# EAGLE board NU-Sockisop (EAGLE 5.11)
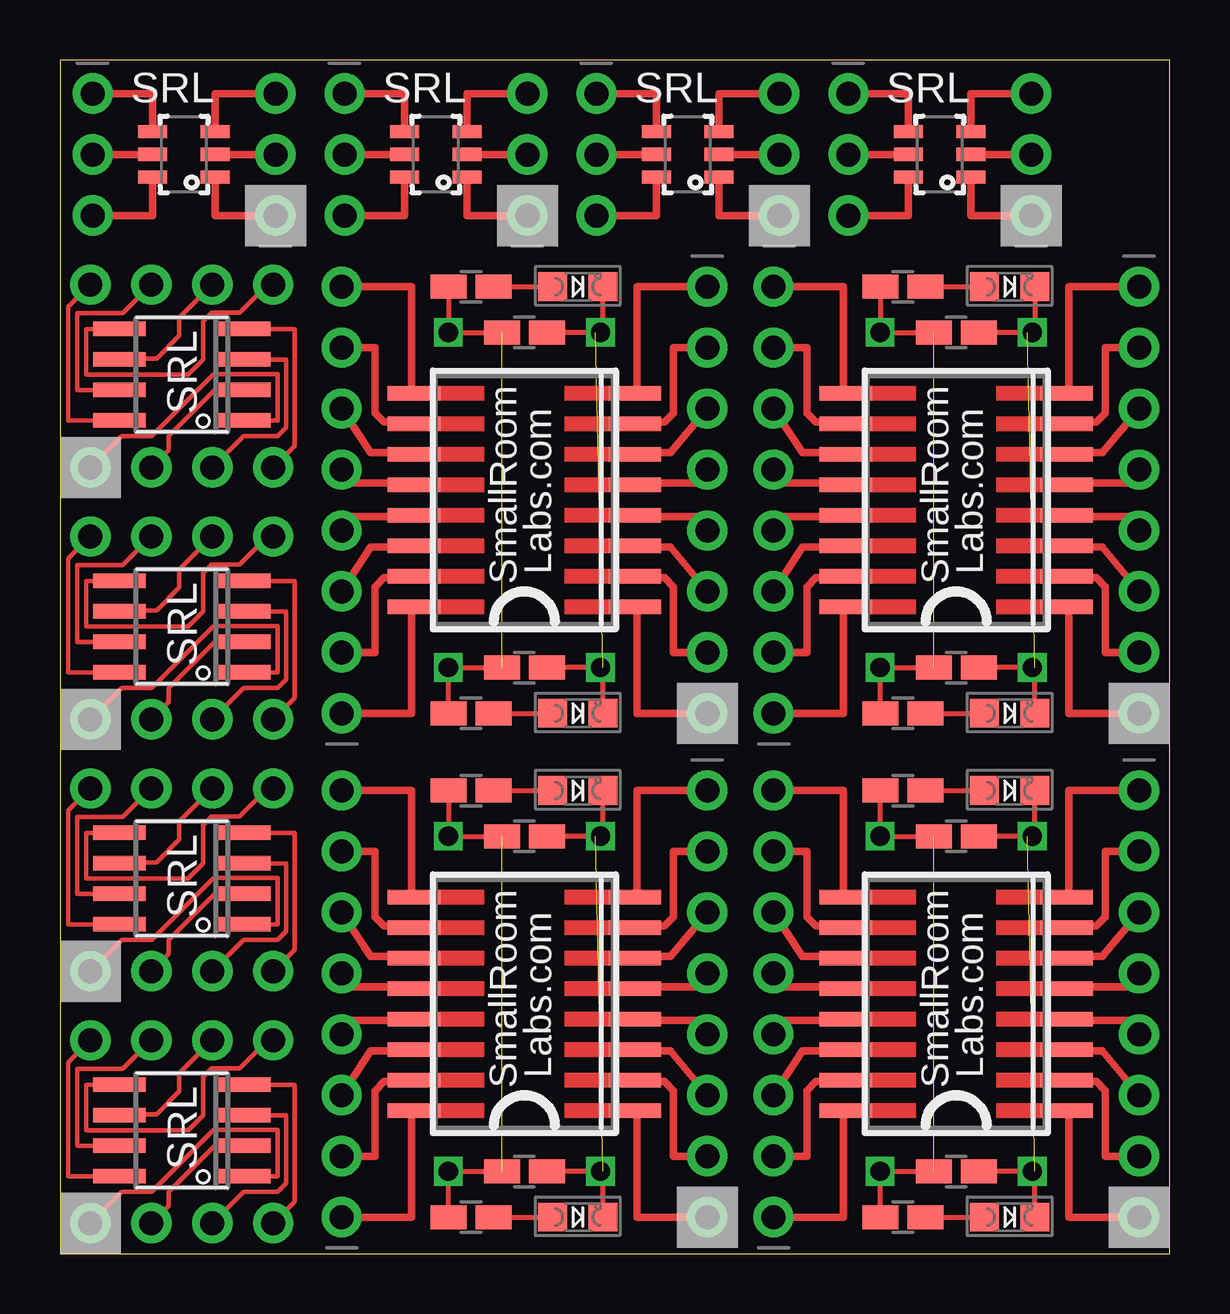
[diagram p0: board, top side]
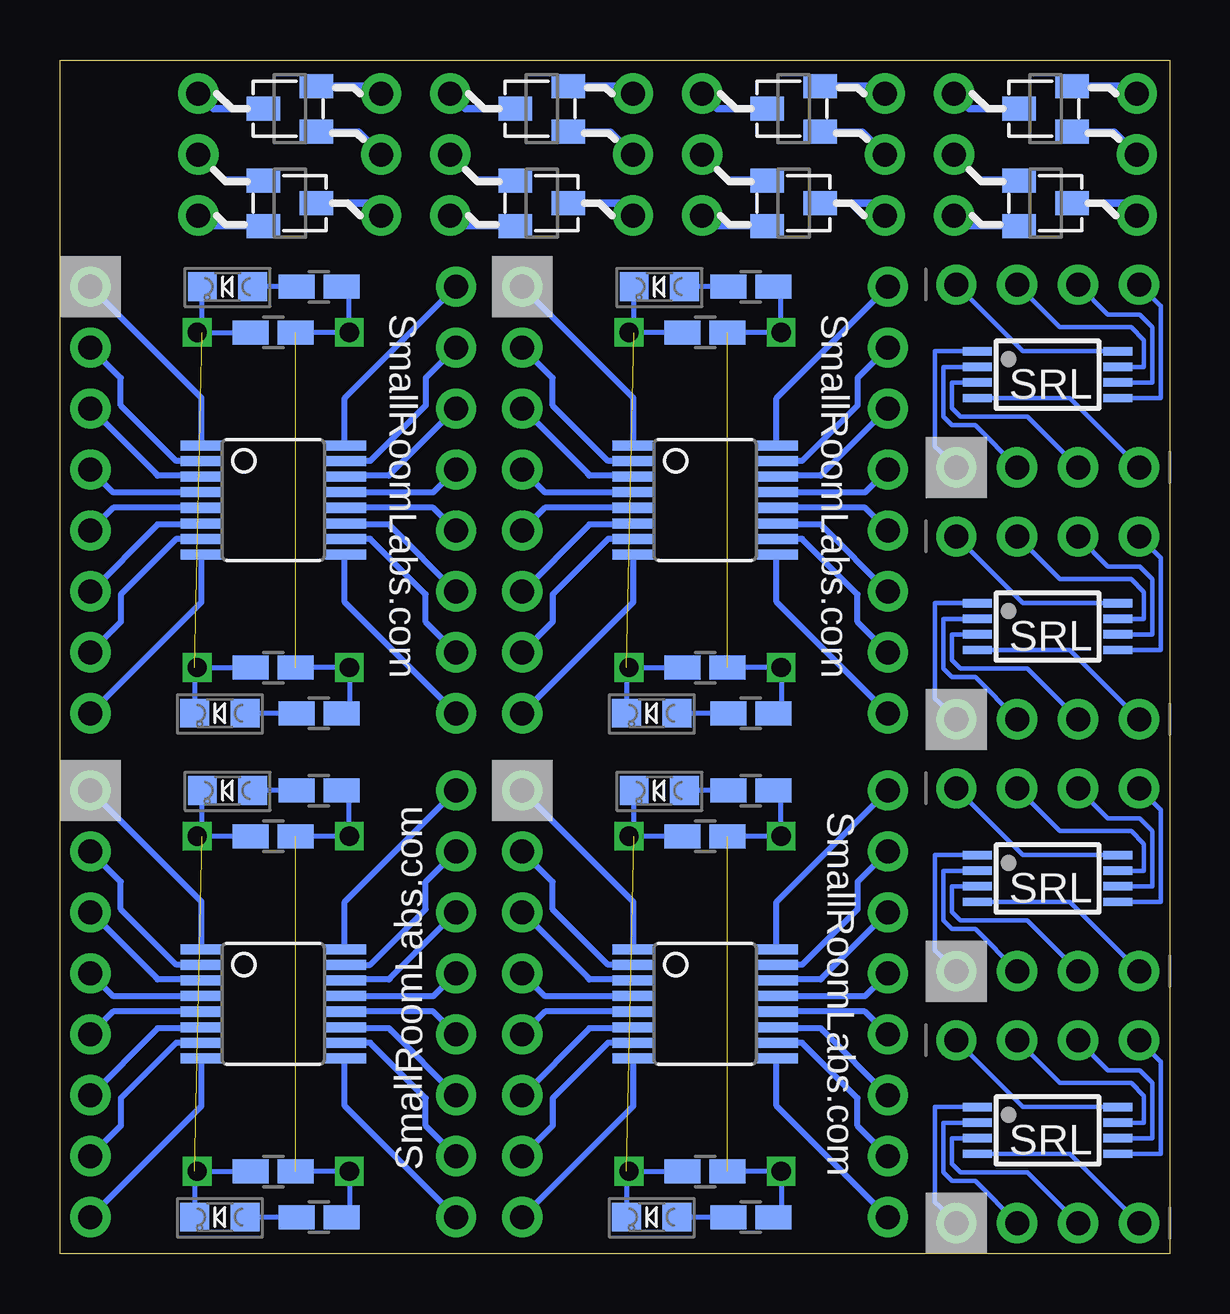
[diagram p1: board, bottom side, seen from below]

Size 46.25 x 49.75 mm. Coordinates in mm from the lower left corner, seen from the top.
Outline: 0,0 46.25,0 46.25,49.75 0,49.75 0,0
Copper layers (1*16): Top 0.035mm / dielectric 1.5mm / Bottom 0.035mm
Design rules "Fusion_eagle_rule_v1.1": minimum track width 6mil, minimum drill 12mil, track to track 6mil, track to pad 6mil, pad to pad 6mil, via to via 6mil, smd to smd 0mil, copper to edge 10mil, drill to drill 10mil, minimum pad ring 10mil, minimum via ring 6mil, stop-mask expansion 2mil, vias tented up to drill 100mil, thermal gap 10mil
Net classes: 0 default: width 0.178 mm, drill 0.305 mm, clearance 0.178 mm

## Footprints (pad centres in the part's own frame; a part is rotated, then mirrored left to right if it is on the bottom)
CHIPLED_0805 = smd 1.2 x 1.2: A 0,-1.05; C 0,1.05
SOT23-6 = smd 0.55 x 1.2: 1 0.32,-1.3; 2 1.27,-1.3; 3 2.22,-1.3; 4 2.22,1.3; 5 1.27,1.3; 6 0.32,1.3
SOT23 = smd 1 x 1.4: 1 -0.95,-1.1; 2 0.95,-1.1; 3 0,1.1
SOIC8 = smd 0.6 x 2.2: 1 -1.905,-2.6; 2 -0.635,-2.6; 3 0.635,-2.6; 4 1.905,-2.6; 5 1.905,2.6; 6 0.635,2.6; 7 -0.635,2.6; 8 -1.905,2.6
TSSOP8 = smd 1.2 x 0.35: 1 -2.925,0.975; 2 -2.925,0.325; 3 -2.925,-0.325; 4 -2.925,-0.975; 5 2.925,-0.975; 6 2.925,-0.325; 7 2.925,0.325; 8 2.925,0.975
SOIC16-DW = smd 0.6 x 2.2: 1 -4.445,-4.6; 2 -3.175,-4.6; 3 -1.905,-4.6; 4 -0.635,-4.6; 5 0.635,-4.6; 6 1.905,-4.6; 7 3.175,-4.6; 8 4.445,-4.6; 9 4.445,4.6; 10 3.175,4.6; 11 1.905,4.6; 12 0.635,4.6; 13 -0.635,4.6; 14 -1.905,4.6; 15 -3.175,4.6; 16 -4.445,4.6
TSSOP16L = smd 0.42 x 1.78: 1 -2.275,-2.97; 2 -1.625,-2.97; 3 -0.975,-2.97; 4 -0.325,-2.97; 5 0.325,-2.97; 6 0.975,-2.97; 7 1.625,-2.97; 8 2.275,-2.97; 9 2.275,2.97; 10 1.625,2.97; 11 0.975,2.97; 12 0.325,2.97; 13 -0.325,2.97; 14 -0.975,2.97; 15 -1.625,2.97; 16 -2.275,2.97
1X03_ROUND = drill 1 pad 1.676 round: 1 -2.54,0; 2 0,0; 3 2.54,0
1X04_ROUND = drill 1 pad 1.676 round: 1 -3.81,0; 2 -1.27,0; 3 1.27,0; 4 3.81,0
1X08_ROUND = drill 1 pad 1.676 round: 1 -8.89,0; 2 -6.35,0; 3 -3.81,0; 4 -1.27,0; 5 1.27,0; 6 3.81,0; 7 6.35,0; 8 8.89,0
R0805W = smd 1.5 x 1: 1 -0.94,0; 2 0.94,0

## Placement (x,y rotation side)
D1  LEDSMD0805  [CHIPLED_0805]  21.27,19.3 90 bottom
D2  LEDSMD0805  [CHIPLED_0805]  21.58,1.52 90 bottom
D3  LEDSMD0805  [CHIPLED_0805]  21.58,19.3 270 top
D4  LEDSMD0805  [CHIPLED_0805]  21.58,1.52 270 top
D5  LEDSMD0805  [CHIPLED_0805]  39.27,19.3 90 bottom
D6  LEDSMD0805  [CHIPLED_0805]  39.58,1.52 90 bottom
D7  LEDSMD0805  [CHIPLED_0805]  39.58,19.3 270 top
D8  LEDSMD0805  [CHIPLED_0805]  39.58,1.52 270 top
D9  LEDSMD0805  [CHIPLED_0805]  21.27,40.3 90 bottom
D10  LEDSMD0805  [CHIPLED_0805]  21.58,22.52 90 bottom
D11  LEDSMD0805  [CHIPLED_0805]  21.58,40.3 270 top
D12  LEDSMD0805  [CHIPLED_0805]  21.58,22.52 270 top
D13  LEDSMD0805  [CHIPLED_0805]  39.27,40.3 90 bottom
D14  LEDSMD0805  [CHIPLED_0805]  39.58,22.52 90 bottom
D15  LEDSMD0805  [CHIPLED_0805]  39.58,40.3 270 top
D16  LEDSMD0805  [CHIPLED_0805]  39.58,22.52 270 top
IC1  IC6SOT23  [SOT23-6]  5.17,44.54 90 top
IC2  IC3  [SOT23]  5.17,43.78 270 bottom
IC3  IC3  [SOT23]  5.17,47.72 90 bottom
IC4  IC6SOT23  [SOT23-6]  15.67,44.54 90 top
IC5  IC8SOIC  [SOIC8]  5.08,36.63 90 top
IC6  IC8TSSOP  [TSSOP8]  5.08,36.63 0 bottom
IC7  IC8SOIC  [SOIC8]  5.08,26.13 90 top
IC8  IC8TSSOP  [TSSOP8]  5.08,26.13 0 bottom
IC9  IC8SOIC  [SOIC8]  5.08,15.63 90 top
IC10  IC8TSSOP  [TSSOP8]  5.08,15.63 0 bottom
IC11  IC8SOIC  [SOIC8]  5.08,5.13 90 top
IC12  IC8TSSOP  [TSSOP8]  5.08,5.13 0 bottom
IC13  IC16SOIC  [SOIC16-DW]  19.36,10.41 90 top
IC14  IC16TSSOP  [TSSOP16L]  19.36,10.41 270 bottom
IC15  IC16SOIC  [SOIC16-DW]  37.36,10.41 90 top
IC16  IC16TSSOP  [TSSOP16L]  37.36,10.41 270 bottom
IC17  IC16SOIC  [SOIC16-DW]  19.36,31.41 90 top
IC18  IC16TSSOP  [TSSOP16L]  19.36,31.41 270 bottom
IC19  IC16SOIC  [SOIC16-DW]  37.36,31.41 90 top
IC20  IC16TSSOP  [TSSOP16L]  37.36,31.41 270 bottom
IC21  IC3  [SOT23]  15.67,43.78 270 bottom
IC22  IC3  [SOT23]  15.67,47.72 90 bottom
IC23  IC6SOT23  [SOT23-6]  26.17,44.54 90 top
IC24  IC3  [SOT23]  26.17,43.78 270 bottom
IC25  IC3  [SOT23]  26.17,47.72 90 bottom
IC26  IC6SOT23  [SOT23-6]  36.67,44.54 90 top
IC27  IC3  [SOT23]  36.67,43.78 270 bottom
IC28  IC3  [SOT23]  36.67,47.72 90 bottom
JP1  [1X03_ROUND]  8.98,45.81 90 top
JP2  [1X03_ROUND]  1.36,45.81 270 top
JP3  [1X03_ROUND]  19.48,45.81 90 top
JP4  [1X03_ROUND]  11.86,45.81 270 top
JP5  [1X04_ROUND]  5.08,40.39 0 bottom
JP6  [1X04_ROUND]  5.08,32.77 180 bottom
JP7  [1X04_ROUND]  5.08,29.89 0 bottom
JP8  [1X04_ROUND]  5.08,22.27 180 bottom
JP9  [1X04_ROUND]  5.08,19.39 0 bottom
JP10  [1X04_ROUND]  5.08,11.77 180 bottom
JP11  [1X04_ROUND]  5.08,8.89 0 bottom
JP12  [1X04_ROUND]  5.08,1.27 180 bottom
JP13  [1X08_ROUND]  26.98,10.41 270 top
JP14  [1X08_ROUND]  11.74,10.41 90 top
JP15  [1X08_ROUND]  44.98,10.41 270 top
JP16  [1X08_ROUND]  29.74,10.41 90 top
JP17  [1X08_ROUND]  26.98,31.41 270 top
JP18  [1X08_ROUND]  11.74,31.41 90 top
JP19  [1X08_ROUND]  44.98,31.41 270 top
JP20  [1X08_ROUND]  29.74,31.41 90 top
JP21  [1X03_ROUND]  29.98,45.81 90 top
JP22  [1X03_ROUND]  22.36,45.81 270 top
JP23  [1X03_ROUND]  40.48,45.81 90 top
JP24  [1X03_ROUND]  32.86,45.81 270 top
R1  [R0805W]  19.36,3.42 180 bottom
R2  [R0805W]  19.36,17.39 180 bottom
R3  [R0805W]  19.36,3.42 0 top
R4  [R0805W]  19.36,17.39 0 top
R5  [R0805W]  17.14,1.52 0 top
R6  [R0805W]  17.14,19.3 0 top
R7  [R0805W]  17.45,1.52 180 bottom
R8  [R0805W]  17.45,19.3 180 bottom
R9  [R0805W]  37.36,3.42 180 bottom
R10  [R0805W]  37.36,17.39 180 bottom
R11  [R0805W]  37.36,3.42 0 top
R12  [R0805W]  37.36,17.39 0 top
R13  [R0805W]  35.14,1.52 0 top
R14  [R0805W]  35.14,19.3 0 top
R15  [R0805W]  35.45,1.52 180 bottom
R16  [R0805W]  35.45,19.3 180 bottom
R17  [R0805W]  19.36,24.43 180 bottom
R18  [R0805W]  19.36,38.4 180 bottom
R19  [R0805W]  19.36,24.43 0 top
R20  [R0805W]  19.36,38.4 0 top
R21  [R0805W]  17.14,22.52 0 top
R22  [R0805W]  17.14,40.3 0 top
R23  [R0805W]  17.45,22.52 180 bottom
R24  [R0805W]  17.45,40.3 180 bottom
R25  [R0805W]  37.36,24.43 180 bottom
R26  [R0805W]  37.36,38.4 180 bottom
R27  [R0805W]  37.36,24.43 0 top
R28  [R0805W]  37.36,38.4 0 top
R29  [R0805W]  35.14,22.52 0 top
R30  [R0805W]  35.14,40.3 0 top
R31  [R0805W]  35.45,22.52 180 bottom
R32  [R0805W]  35.45,40.3 180 bottom

## Library data of the parts
D1-D16 IC1-IC28 = SmallRoomLabs
JP1-JP24 = microbuilder
R1-R32 = adafruit

## Nets
N$1: IC1.1 IC2.2 JP1.1
N$2: IC1.6 IC2.3 JP2.3
N$3: IC4.1 IC21.2 JP3.1
N$4: IC1.4 IC3.2 JP2.1
N$5: IC1.5 IC3.1 JP2.2
N$6: IC4.4 IC22.2 JP4.1
N$7: IC4.5 IC22.1 JP4.2
N$8: IC1.2 IC2.1 JP1.2
N$9: IC1.3 IC3.3 JP1.3
N$10: IC4.2 IC21.1 JP3.2
N$11: IC4.3 IC22.3 JP3.3
N$12: IC4.6 IC21.3 JP4.3
N$13: IC23.1 IC24.2 JP21.1
N$14: IC23.4 IC25.2 JP22.1
N$15: IC23.5 IC25.1 JP22.2
N$16: IC23.2 IC24.1 JP21.2
N$17: IC23.3 IC25.3 JP21.3
N$18: IC23.6 IC24.3 JP22.3
N$19: IC26.1 IC27.2 JP23.1
N$20: IC26.4 IC28.2 JP24.1
N$21: IC26.5 IC28.1 JP24.2
N$22: IC26.2 IC27.1 JP23.2
N$23: IC26.3 IC28.3 JP23.3
N$24: IC26.6 IC27.3 JP24.3
N$25: IC5.4 IC6.1 JP6.4
N$26: IC5.3 IC6.2 JP6.3
N$27: IC5.2 IC6.3 JP6.2
N$28: IC5.1 IC6.4 JP6.1
N$29: IC5.5 IC6.8 JP5.1
N$30: IC5.6 IC6.7 JP5.2
N$31: IC5.7 IC6.6 JP5.3
N$32: IC5.8 IC6.5 JP5.4
N$33: IC7.4 IC8.1 JP8.4
N$34: IC7.3 IC8.2 JP8.3
N$35: IC7.2 IC8.3 JP8.2
N$36: IC7.1 IC8.4 JP8.1
N$37: IC7.5 IC8.8 JP7.1
N$38: IC7.6 IC8.7 JP7.2
N$39: IC7.7 IC8.6 JP7.3
N$40: IC7.8 IC8.5 JP7.4
N$41: IC9.4 IC10.1 JP10.4
N$42: IC9.3 IC10.2 JP10.3
N$43: IC9.2 IC10.3 JP10.2
N$44: IC9.1 IC10.4 JP10.1
N$45: IC9.5 IC10.8 JP9.1
N$46: IC9.6 IC10.7 JP9.2
N$47: IC9.7 IC10.6 JP9.3
N$48: IC9.8 IC10.5 JP9.4
N$49: IC11.4 IC12.1 JP12.4
N$50: IC11.3 IC12.2 JP12.3
N$51: IC11.2 IC12.3 JP12.2
N$52: IC11.1 IC12.4 JP12.1
N$53: IC11.5 IC12.8 JP11.1
N$54: IC11.6 IC12.7 JP11.2
N$55: IC11.7 IC12.6 JP11.3
N$56: IC11.8 IC12.5 JP11.4
N$57: IC13.1 IC14.8 JP13.8
N$58: IC13.2 IC14.7 JP13.7
N$59: IC13.3 IC14.6 JP13.6
N$60: IC13.4 IC14.5 JP13.5
N$61: IC13.5 IC14.4 JP13.4
N$62: IC13.6 IC14.3 JP13.3
N$63: IC13.7 IC14.2 JP13.2
N$64: IC13.8 IC14.1 JP13.1
N$65: IC13.16 IC14.9 JP14.1
N$66: IC13.15 IC14.10 JP14.2
N$67: IC13.14 IC14.11 JP14.3
N$68: IC13.13 IC14.12 JP14.4
N$69: IC13.12 IC14.13 JP14.5
N$70: IC13.11 IC14.14 JP14.6
N$71: IC13.10 IC14.15 JP14.7
N$72: IC13.9 IC14.16 JP14.8
N$73: D1.A R8.2
N$74: D2.A R7.2
N$75: D3.A R6.2
N$76: D4.A R5.2
N$77: IC15.1 IC16.8 JP15.8
N$78: IC15.2 IC16.7 JP15.7
N$79: IC15.3 IC16.6 JP15.6
N$80: IC15.4 IC16.5 JP15.5
N$81: IC15.5 IC16.4 JP15.4
N$82: IC15.6 IC16.3 JP15.3
N$83: IC15.7 IC16.2 JP15.2
N$84: IC15.8 IC16.1 JP15.1
N$85: IC15.16 IC16.9 JP16.1
N$86: IC15.15 IC16.10 JP16.2
N$87: IC15.14 IC16.11 JP16.3
N$88: IC15.13 IC16.12 JP16.4
N$89: IC15.12 IC16.13 JP16.5
N$90: IC15.11 IC16.14 JP16.6
N$91: IC15.10 IC16.15 JP16.7
N$92: IC15.9 IC16.16 JP16.8
N$93: D5.A R16.2
N$94: D6.A R15.2
N$95: D7.A R14.2
N$96: D8.A R13.2
N$97: IC17.1 IC18.8 JP17.8
N$98: IC17.2 IC18.7 JP17.7
N$99: IC17.3 IC18.6 JP17.6
N$100: IC17.4 IC18.5 JP17.5
N$101: IC17.5 IC18.4 JP17.4
N$102: IC17.6 IC18.3 JP17.3
N$103: IC17.7 IC18.2 JP17.2
N$104: IC17.8 IC18.1 JP17.1
N$105: IC17.16 IC18.9 JP18.1
N$106: IC17.15 IC18.10 JP18.2
N$107: IC17.14 IC18.11 JP18.3
N$108: IC17.13 IC18.12 JP18.4
N$109: IC17.12 IC18.13 JP18.5
N$110: IC17.11 IC18.14 JP18.6
N$111: IC17.10 IC18.15 JP18.7
N$112: IC17.9 IC18.16 JP18.8
N$113: D9.A R24.2
N$114: D10.A R23.2
N$115: D11.A R22.2
N$116: D12.A R21.2
N$117: IC19.1 IC20.8 JP19.8
N$118: IC19.2 IC20.7 JP19.7
N$119: IC19.3 IC20.6 JP19.6
N$120: IC19.4 IC20.5 JP19.5
N$121: IC19.5 IC20.4 JP19.4
N$122: IC19.6 IC20.3 JP19.3
N$123: IC19.7 IC20.2 JP19.2
N$124: IC19.8 IC20.1 JP19.1
N$125: IC19.16 IC20.9 JP20.1
N$126: IC19.15 IC20.10 JP20.2
N$127: IC19.14 IC20.11 JP20.3
N$128: IC19.13 IC20.12 JP20.4
N$129: IC19.12 IC20.13 JP20.5
N$130: IC19.11 IC20.14 JP20.6
N$131: IC19.10 IC20.15 JP20.7
N$132: IC19.9 IC20.16 JP20.8
N$133: D13.A R32.2
N$134: D14.A R31.2
N$135: D15.A R30.2
N$136: D16.A R29.2
NEG1: D5.C D6.C D7.C D8.C R9.2 R10.2 R11.2 R12.2
NEG2: D9.C D10.C D11.C D12.C R17.2 R18.2 R19.2 R20.2
NEG3: D13.C D14.C D15.C D16.C R25.2 R26.2 R27.2 R28.2
NEG4: D1.C D2.C D3.C D4.C R1.2 R2.2 R3.2 R4.2
POS1: R9.1 R10.1 R11.1 R12.1 R13.1 R14.1 R15.1 R16.1
POS2: R17.1 R18.1 R19.1 R20.1 R21.1 R22.1 R23.1 R24.1
POS3: R25.1 R26.1 R27.1 R28.1 R29.1 R30.1 R31.1 R32.1
POS4: R1.1 R2.1 R3.1 R4.1 R5.1 R6.1 R7.1 R8.1

## Tracks (layer width: path | path; a pad name or v marks a point on that pad's centre or on a via)
N$1
  Top 0.305: JP1.1 6.47,43.27 6.46,43.45 6.46,44.84 IC1.1
  Bottom 0.305: JP1.1 8.55,42.84 6.29,42.84 IC2.2
N$2
  Top 0.305: IC1.6 3.88,44.84 3.88,43.45 3.87,43.27 3.72,43.27 JP2.3
  Bottom 0.305: JP2.3 1.87,43.78 4.05,43.78 IC2.3
N$3
  Top 0.305: JP3.1 16.97,43.27 16.96,43.45 16.96,44.84 IC4.1
  Bottom 0.305: JP3.1 19.05,42.84 16.79,42.84 IC21.2
N$4
  Top 0.305: JP2.1 3.87,48.35 3.88,48.17 3.88,46.77 IC1.4
  Bottom 0.305: JP2.1 1.67,48.66 4.05,48.66 IC3.2
N$5
  Top 0.305: JP2.2 3.85,45.81 IC1.5
  Bottom 0.305: JP2.2 2.3,46.75 4.05,46.75 IC3.1
N$6
  Top 0.305: JP4.1 14.37,48.35 14.38,48.17 14.38,46.77 IC4.4
  Bottom 0.305: JP4.1 12.16,48.66 14.55,48.66 IC22.2
N$7
  Top 0.305: JP4.2 14.35,45.81 IC4.5
  Bottom 0.305: JP4.2 12.8,46.75 14.55,46.75 IC22.1
N$8
  Top 0.305: JP1.2 6.49,45.81 IC1.2
  Bottom 0.305: JP1.2 7.91,44.74 6.29,44.74 IC2.1
N$9
  Top 0.305: JP1.3 6.47,48.35 6.46,48.17 6.46,46.77 IC1.3
  Bottom 0.305: JP1.3 8.35,47.72 6.29,47.72 IC3.3
N$10
  Top 0.305: JP3.2 16.99,45.81 IC4.2
  Bottom 0.305: JP3.2 18.41,44.74 16.79,44.74 IC21.1
N$11
  Top 0.305: JP3.3 16.97,48.35 16.96,48.17 16.96,46.77 IC4.3
  Bottom 0.305: JP3.3 18.84,47.72 16.79,47.72 IC22.3
N$12
  Top 0.305: IC4.6 14.38,44.84 14.38,43.45 14.37,43.27 14.22,43.27 JP4.3
  Bottom 0.305: JP4.3 12.37,43.78 14.55,43.78 IC21.3
N$13
  Top 0.305: JP21.1 27.47,43.27 27.46,43.45 27.46,44.84 IC23.1
  Bottom 0.305: JP21.1 29.55,42.84 27.29,42.84 IC24.2
N$14
  Top 0.305: JP22.1 24.87,48.35 24.88,48.17 24.88,46.77 IC23.4
  Bottom 0.305: JP22.1 22.66,48.66 25.05,48.66 IC25.2
N$15
  Top 0.305: JP22.2 24.85,45.81 IC23.5
  Bottom 0.305: JP22.2 23.3,46.75 25.05,46.75 IC25.1
N$16
  Top 0.305: JP21.2 27.49,45.81 IC23.2
  Bottom 0.305: JP21.2 28.91,44.74 27.29,44.74 IC24.1
N$17
  Top 0.305: JP21.3 27.47,48.35 27.46,48.17 27.46,46.77 IC23.3
  Bottom 0.305: JP21.3 29.34,47.72 27.29,47.72 IC25.3
N$18
  Top 0.305: IC23.6 24.88,44.84 24.88,43.45 24.87,43.27 24.72,43.27 JP22.3
  Bottom 0.305: JP22.3 22.87,43.78 25.05,43.78 IC24.3
N$19
  Top 0.305: JP23.1 37.97,43.27 37.97,43.45 37.97,44.84 IC26.1
  Bottom 0.305: JP23.1 40.05,42.84 37.79,42.84 IC27.2
N$20
  Top 0.305: JP24.1 35.37,48.35 35.38,48.17 35.38,46.77 IC26.4
  Bottom 0.305: JP24.1 33.16,48.66 35.55,48.66 IC28.2
N$21
  Top 0.305: JP24.2 35.35,45.81 IC26.5
  Bottom 0.305: JP24.2 33.8,46.75 35.55,46.75 IC28.1
N$22
  Top 0.305: JP23.2 37.99,45.81 IC26.2
  Bottom 0.305: JP23.2 39.41,44.74 37.79,44.74 IC27.1
N$23
  Top 0.305: JP23.3 37.97,48.35 37.97,48.17 37.97,46.77 IC26.3
  Bottom 0.305: JP23.3 39.84,47.72 37.79,47.72 IC28.3
N$24
  Top 0.305: IC26.6 35.38,44.84 35.38,43.45 35.37,43.27 35.22,43.27 JP24.3
  Bottom 0.305: JP24.3 33.37,43.78 35.55,43.78 IC27.3
N$25
  Top 0.178: IC5.4 9.78,38.54 9.78,33.66 JP6.4
  Bottom 0.178: IC6.1 9.78,37.61 9.78,33.63 9.58,33.46 JP6.4
N$26
  Top 0.178: IC5.3 9.42,37.27 9.42,34.43 9.07,34.08 7.66,34.08 JP6.3
  Bottom 0.178: IC6.2 9.42,36.96 9.42,34.88 9.07,34.52 8.1,34.52 JP6.3
N$27
  Top 0.178: IC5.2 6.45,36 4.53,34.08 4.53,33.49 JP6.2
  Bottom 0.178: IC6.3 9.06,36.31 9.07,36.3 9.07,35.23 8.71,34.88 5.92,34.88 JP6.2
N$28
  Top 0.178: IC5.1 9.07,34.73 9.07,36.66 6.4,36.66 3.82,34.08 2.58,34.08 JP6.1
  Bottom 0.178: IC6.4 4.16,35.66 JP6.1
N$29
  Top 0.178: IC5.5 1.09,38.54 1.09,36.63 5.33,36.63 5.97,37.27 5.97,38.87 6.33,39.22 7.49,39.22 8.66,40.39 JP5.1
  Bottom 0.178: IC6.8 6.11,37.61 JP5.1
N$30
  Top 0.178: IC5.6 2.5,37.3 4.02,37.3 4.98,38.26 4.98,39.02 JP5.2
  Bottom 0.178: IC6.7 1.07,36.96 1.07,38.08 1.6,38.61 4.57,38.61 JP5.2
N$31
  Top 0.178: IC5.7 2.4,36 1.9,36 0.72,35.99 0.72,39.2 1.3,39.2 2.62,39.2 JP5.3
  Bottom 0.178: IC6.6 0.89,36.31 0.89,36.3 0.71,36.3 0.71,38.61 1.25,39.15 2.56,39.15 JP5.3
N$32
  Top 0.178: JP5.4 0.34,39.46 0.34,34.73 IC5.8
  Bottom 0.178: IC6.5 0.36,35.66 0.36,39.5 0.38,39.5 JP5.4
N$33
  Top 0.178: IC7.4 9.78,28.04 9.78,23.16 JP8.4
  Bottom 0.178: IC8.1 9.78,27.11 9.78,23.13 9.58,22.96 JP8.4
N$34
  Top 0.178: IC7.3 9.42,26.77 9.42,23.93 9.07,23.58 7.66,23.58 JP8.3
  Bottom 0.178: IC8.2 9.42,26.46 9.42,24.38 9.07,24.02 8.1,24.02 JP8.3
N$35
  Top 0.178: IC7.2 6.45,25.5 4.53,23.58 4.53,22.99 JP8.2
  Bottom 0.178: IC8.3 9.06,25.81 9.07,25.8 9.07,24.73 8.71,24.38 5.92,24.38 JP8.2
N$36
  Top 0.178: IC7.1 9.07,24.23 9.07,26.16 6.4,26.16 3.82,23.58 2.58,23.58 JP8.1
  Bottom 0.178: IC8.4 4.16,25.16 JP8.1
N$37
  Top 0.178: IC7.5 1.09,28.04 1.09,26.13 5.33,26.13 5.97,26.77 5.97,28.37 6.33,28.72 7.49,28.72 8.66,29.89 JP7.1
  Bottom 0.178: IC8.8 6.11,27.11 JP7.1
N$38
  Top 0.178: IC7.6 2.5,26.8 4.02,26.8 4.98,27.76 4.98,28.52 JP7.2
  Bottom 0.178: IC8.7 1.07,26.46 1.07,27.58 1.6,28.11 4.57,28.11 JP7.2
N$39
  Top 0.178: IC7.7 2.4,25.5 1.9,25.5 0.72,25.49 0.72,28.7 1.3,28.7 2.62,28.7 JP7.3
  Bottom 0.178: IC8.6 0.89,25.81 0.89,25.8 0.71,25.8 0.71,28.11 1.25,28.64 2.56,28.64 JP7.3
N$40
  Top 0.178: JP7.4 0.34,28.96 0.34,24.23 IC7.8
  Bottom 0.178: IC8.5 0.36,25.16 0.36,29 0.38,29 JP7.4
N$41
  Top 0.178: IC9.4 9.78,17.54 9.78,12.66 JP10.4
  Bottom 0.178: IC10.1 9.78,16.61 9.78,12.63 9.58,12.46 JP10.4
N$42
  Top 0.178: IC9.3 9.42,16.27 9.42,13.43 9.07,13.08 7.66,13.08 JP10.3
  Bottom 0.178: IC10.2 9.42,15.96 9.42,13.88 9.07,13.52 8.1,13.52 JP10.3
N$43
  Top 0.178: IC9.2 6.45,15 4.53,13.08 4.53,12.49 JP10.2
  Bottom 0.178: IC10.3 9.06,15.31 9.07,15.3 9.07,14.23 8.71,13.88 5.92,13.88 JP10.2
N$44
  Top 0.178: IC9.1 9.07,13.73 9.07,15.66 6.4,15.66 3.82,13.08 2.58,13.08 JP10.1
  Bottom 0.178: IC10.4 4.16,14.66 JP10.1
N$45
  Top 0.178: IC9.5 1.09,17.54 1.09,15.63 5.33,15.63 5.97,16.27 5.97,17.87 6.33,18.22 7.49,18.22 8.66,19.39 JP9.1
  Bottom 0.178: IC10.8 6.11,16.61 JP9.1
N$46
  Top 0.178: IC9.6 2.5,16.3 4.02,16.3 4.98,17.26 4.98,18.02 JP9.2
  Bottom 0.178: IC10.7 1.07,15.96 1.07,17.08 1.6,17.61 4.57,17.61 JP9.2
N$47
  Top 0.178: IC9.7 2.4,15 1.9,15 0.72,14.99 0.72,18.2 1.3,18.2 2.62,18.2 JP9.3
  Bottom 0.178: IC10.6 0.89,15.31 0.89,15.3 0.71,15.3 0.71,17.61 1.25,18.14 2.56,18.14 JP9.3
N$48
  Top 0.178: JP9.4 0.34,18.46 0.34,13.73 IC9.8
  Bottom 0.178: IC10.5 0.36,14.66 0.36,18.5 0.38,18.5 JP9.4
N$49
  Top 0.178: IC11.4 9.78,7.04 9.78,2.16 JP12.4
  Bottom 0.178: IC12.1 9.78,6.11 9.78,2.13 9.58,1.96 JP12.4
N$50
  Top 0.178: IC11.3 9.42,5.77 9.42,2.93 9.07,2.58 7.66,2.58 JP12.3
  Bottom 0.178: IC12.2 9.42,5.46 9.42,3.38 9.07,3.02 8.1,3.02 JP12.3
N$51
  Top 0.178: IC11.2 6.45,4.5 4.53,2.58 4.53,1.99 JP12.2
  Bottom 0.178: IC12.3 9.06,4.81 9.07,4.8 9.07,3.73 8.71,3.38 5.92,3.38 JP12.2
N$52
  Top 0.178: IC11.1 9.07,3.23 9.07,5.16 6.4,5.16 3.82,2.58 2.58,2.58 JP12.1
  Bottom 0.178: IC12.4 4.16,4.16 JP12.1
N$53
  Top 0.178: IC11.5 1.09,7.04 1.09,5.13 5.33,5.13 5.97,5.77 5.97,7.37 6.33,7.72 7.49,7.72 8.66,8.89 JP11.1
  Bottom 0.178: IC12.8 6.11,6.11 JP11.1
N$54
  Top 0.178: IC11.6 2.5,5.8 4.02,5.8 4.98,6.76 4.98,7.52 JP11.2
  Bottom 0.178: IC12.7 1.07,5.46 1.07,6.58 1.6,7.11 4.57,7.11 JP11.2
N$55
  Top 0.178: IC11.7 2.4,4.5 1.9,4.5 0.72,4.49 0.72,7.7 1.3,7.7 2.62,7.7 JP11.3
  Bottom 0.178: IC12.6 0.89,4.81 0.89,4.8 0.71,4.8 0.71,7.11 1.25,7.64 2.56,7.64 JP11.3
N$56
  Top 0.178: JP11.4 0.34,7.96 0.34,3.23 IC11.8
  Bottom 0.178: IC12.5 0.36,4.16 0.36,8 0.38,8 JP11.4
N$57
  Top 0.305: JP13.8 24.06,1.52 24.06,5.96 IC13.1
  Bottom 0.254: JP13.8 22.34,6.16 22.34,8.12 IC14.8
N$58
  Top 0.305: JP13.7 25.58,4.06 25.58,6.79 25.2,7.17 24.44,7.17 24.06,7.24 IC13.2
  Bottom 0.254: JP13.7 25.71,5.33 25.71,6.47 23.4,8.78 IC14.7
N$59
  Top 0.305: JP13.6 25.46,8.44 24.44,8.44 24.06,8.51 IC13.3
  Bottom 0.254: IC14.6 22.37,9.39 24.19,9.39 24.26,9.29 26.95,6.6 JP13.6
N$60
  Top 0.305: JP13.5 26.73,9.71 24.44,9.71 24.06,9.78 IC13.4
  Bottom 0.254: JP13.5 26.03,10.09 22.34,10.09 IC14.5
N$61
  Top 0.305: JP13.4 26.73,11.11 24.44,11.11 24.06,11.04 IC13.5
  Bottom 0.254: JP13.4 26.03,10.73 22.34,10.73 IC14.4
N$62
  Top 0.305: JP13.3 25.46,12.38 24.12,12.38 24.06,12.31 IC13.6
  Bottom 0.254: IC14.3 22.37,11.43 24.19,11.43 24.26,11.53 26.95,14.22 JP13.3
N$63
  Top 0.305: JP13.2 25.58,16.76 25.58,14.03 25.2,13.65 24.44,13.65 24.06,13.59 IC13.7
  Bottom 0.254: JP13.2 25.71,15.49 25.71,14.35 23.4,12.04 IC14.2
N$64
  Top 0.305: JP13.1 24.06,19.3 24.06,14.86 IC13.8
  Bottom 0.254: JP13.1 22.34,14.66 22.34,12.7 IC14.1
N$65
  Top 0.305: JP14.1 14.66,1.52 14.66,5.96 IC13.16
  Bottom 0.254: JP14.1 16.38,6.16 16.38,8.12 IC14.9
N$66
  Top 0.305: JP14.2 13.14,4.06 13.14,6.79 13.52,7.17 14.28,7.17 14.66,7.24 IC13.15
  Bottom 0.254: JP14.2 13.01,5.33 13.01,6.47 15.32,8.78 IC14.10
N$67
  Top 0.305: JP14.3 12.95,8.44 14.28,8.44 14.66,8.51 IC13.14
  Bottom 0.254: IC14.11 16.35,9.39 14.53,9.39 14.46,9.29 11.77,6.6 JP14.3
N$68
  Top 0.305: JP14.4 11.99,9.71 14.28,9.71 14.66,9.78 IC13.13
  Bottom 0.254: JP14.4 12.69,10.09 16.38,10.09 IC14.12
N$69
  Top 0.305: JP14.5 11.99,11.11 14.28,11.11 14.66,11.04 IC13.12
  Bottom 0.254: JP14.5 12.69,10.73 16.38,10.73 IC14.13
N$70
  Top 0.305: JP14.6 12.95,12.38 14.28,12.38 14.66,12.31 IC13.11
  Bottom 0.254: IC14.14 16.35,11.43 14.53,11.43 14.46,11.53 11.77,14.22 JP14.6
N$71
  Top 0.305: JP14.7 13.14,16.76 13.14,14.03 13.52,13.65 14.28,13.65 14.66,13.59 IC13.10
  Bottom 0.254: JP14.7 13.01,15.49 13.01,14.35 15.32,12.04 IC14.15
N$72
  Top 0.305: JP14.8 14.66,19.3 14.66,14.86 IC13.9
  Bottom 0.254: JP14.8 16.38,14.66 16.38,12.7 IC14.16
N$73
  Bottom 0.203: R8.2 D1.A
N$74
  Bottom 0.203: R7.2 D2.A
N$75
  Top 0.203: R6.2 D3.A
N$76
  Top 0.203: R5.2 D4.A
N$77
  Top 0.305: JP15.8 42.06,1.52 42.06,5.96 IC15.1
  Bottom 0.254: JP15.8 40.34,6.16 40.34,8.12 IC16.8
N$78
  Top 0.305: JP15.7 43.58,4.06 43.58,6.79 43.2,7.17 42.44,7.17 42.06,7.24 IC15.2
  Bottom 0.254: JP15.7 43.71,5.33 43.71,6.47 41.4,8.78 IC16.7
N$79
  Top 0.305: JP15.6 43.46,8.44 42.44,8.44 42.06,8.51 IC15.3
  Bottom 0.254: IC16.6 40.37,9.39 42.19,9.39 42.26,9.29 44.95,6.6 JP15.6
N$80
  Top 0.305: JP15.5 44.73,9.71 42.44,9.71 42.06,9.78 IC15.4
  Bottom 0.254: JP15.5 44.03,10.09 40.34,10.09 IC16.5
N$81
  Top 0.305: JP15.4 44.73,11.11 42.44,11.11 42.06,11.04 IC15.5
  Bottom 0.254: JP15.4 44.03,10.73 40.34,10.73 IC16.4
N$82
  Top 0.305: JP15.3 43.46,12.38 42.12,12.38 42.06,12.31 IC15.6
  Bottom 0.254: IC16.3 40.37,11.43 42.19,11.43 42.26,11.53 44.95,14.22 JP15.3
N$83
  Top 0.305: JP15.2 43.58,16.76 43.58,14.03 43.2,13.65 42.44,13.65 42.06,13.59 IC15.7
  Bottom 0.254: JP15.2 43.71,15.49 43.71,14.35 41.4,12.04 IC16.2
N$84
  Top 0.305: JP15.1 42.06,19.3 42.06,14.86 IC15.8
  Bottom 0.254: JP15.1 40.34,14.66 40.34,12.7 IC16.1
N$85
  Top 0.305: JP16.1 32.66,1.52 32.66,5.96 IC15.16
  Bottom 0.254: JP16.1 34.38,6.16 34.38,8.12 IC16.9
N$86
  Top 0.305: JP16.2 31.14,4.06 31.14,6.79 31.52,7.17 32.28,7.17 32.66,7.24 IC15.15
  Bottom 0.254: JP16.2 31.01,5.33 31.01,6.47 33.32,8.78 IC16.10
N$87
  Top 0.305: JP16.3 30.95,8.44 32.28,8.44 32.66,8.51 IC15.14
  Bottom 0.254: IC16.11 34.35,9.39 32.53,9.39 32.46,9.29 29.77,6.6 JP16.3
N$88
  Top 0.305: JP16.4 29.99,9.71 32.28,9.71 32.66,9.78 IC15.13
  Bottom 0.254: JP16.4 30.69,10.09 34.38,10.09 IC16.12
N$89
  Top 0.305: JP16.5 29.99,11.11 32.28,11.11 32.66,11.04 IC15.12
  Bottom 0.254: JP16.5 30.69,10.73 34.38,10.73 IC16.13
N$90
  Top 0.305: JP16.6 30.95,12.38 32.28,12.38 32.66,12.31 IC15.11
  Bottom 0.254: IC16.14 34.35,11.43 32.53,11.43 32.46,11.53 29.77,14.22 JP16.6
N$91
  Top 0.305: JP16.7 31.14,16.76 31.14,14.03 31.52,13.65 32.28,13.65 32.66,13.59 IC15.10
  Bottom 0.254: JP16.7 31.01,15.49 31.01,14.35 33.32,12.04 IC16.15
N$92
  Top 0.305: JP16.8 32.66,19.3 32.66,14.86 IC15.9
  Bottom 0.254: JP16.8 34.38,14.66 34.38,12.7 IC16.16
N$93
  Bottom 0.203: R16.2 D5.A
N$94
  Bottom 0.203: R15.2 D6.A
N$95
  Top 0.203: R14.2 D7.A
N$96
  Top 0.203: R13.2 D8.A
N$97
  Top 0.305: JP17.8 24.06,22.52 24.06,26.96 IC17.1
  Bottom 0.254: JP17.8 22.34,27.16 22.34,29.12 IC18.8
N$98
  Top 0.305: JP17.7 25.58,25.06 25.58,27.79 25.2,28.17 24.44,28.17 24.06,28.23 IC17.2
  Bottom 0.254: JP17.7 25.71,26.33 25.71,27.47 23.4,29.78 IC18.7
N$99
  Top 0.305: JP17.6 25.46,29.44 24.44,29.44 24.06,29.5 IC17.3
  Bottom 0.254: IC18.6 22.37,30.39 24.19,30.39 24.26,30.29 26.95,27.6 JP17.6
N$100
  Top 0.305: JP17.5 26.73,30.71 24.44,30.71 24.06,30.77 IC17.4
  Bottom 0.254: JP17.5 26.03,31.09 22.34,31.09 IC18.5
N$101
  Top 0.305: JP17.4 26.73,32.11 24.44,32.11 24.06,32.05 IC17.5
  Bottom 0.254: JP17.4 26.03,31.73 22.34,31.73 IC18.4
N$102
  Top 0.305: JP17.3 25.46,33.38 24.12,33.38 24.06,33.31 IC17.6
  Bottom 0.254: IC18.3 22.37,32.43 24.19,32.43 24.26,32.53 26.95,35.22 JP17.3
N$103
  Top 0.305: JP17.2 25.58,37.76 25.58,35.03 25.2,34.65 24.44,34.65 24.06,34.59 IC17.7
  Bottom 0.254: JP17.2 25.71,36.49 25.71,35.35 23.4,33.04 IC18.2
N$104
  Top 0.305: JP17.1 24.06,40.3 24.06,35.85 IC17.8
  Bottom 0.254: JP17.1 22.34,35.66 22.34,33.7 IC18.1
N$105
  Top 0.305: JP18.1 14.66,22.52 14.66,26.96 IC17.16
  Bottom 0.254: JP18.1 16.38,27.16 16.38,29.12 IC18.9
N$106
  Top 0.305: JP18.2 13.14,25.06 13.14,27.79 13.52,28.17 14.28,28.17 14.66,28.23 IC17.15
  Bottom 0.254: JP18.2 13.01,26.33 13.01,27.47 15.32,29.78 IC18.10
N$107
  Top 0.305: JP18.3 12.95,29.44 14.28,29.44 14.66,29.5 IC17.14
  Bottom 0.254: IC18.11 16.35,30.39 14.53,30.39 14.46,30.29 11.77,27.6 JP18.3
N$108
  Top 0.305: JP18.4 11.99,30.71 14.28,30.71 14.66,30.77 IC17.13
  Bottom 0.254: JP18.4 12.69,31.09 16.38,31.09 IC18.12
N$109
  Top 0.305: JP18.5 11.99,32.11 14.28,32.11 14.66,32.05 IC17.12
  Bottom 0.254: JP18.5 12.69,31.73 16.38,31.73 IC18.13
N$110
  Top 0.305: JP18.6 12.95,33.38 14.28,33.38 14.66,33.31 IC17.11
  Bottom 0.254: IC18.14 16.35,32.43 14.53,32.43 14.46,32.53 11.77,35.22 JP18.6
N$111
  Top 0.305: JP18.7 13.14,37.76 13.14,35.03 13.52,34.65 14.28,34.65 14.66,34.59 IC17.10
  Bottom 0.254: JP18.7 13.01,36.49 13.01,35.35 15.32,33.04 IC18.15
N$112
  Top 0.305: JP18.8 14.66,40.3 14.66,35.85 IC17.9
  Bottom 0.254: JP18.8 16.38,35.66 16.38,33.7 IC18.16
N$113
  Bottom 0.203: R24.2 D9.A
N$114
  Bottom 0.203: R23.2 D10.A
N$115
  Top 0.203: R22.2 D11.A
N$116
  Top 0.203: R21.2 D12.A
N$117
  Top 0.305: JP19.8 42.06,22.52 42.06,26.96 IC19.1
  Bottom 0.254: JP19.8 40.34,27.16 40.34,29.12 IC20.8
N$118
  Top 0.305: JP19.7 43.58,25.06 43.58,27.79 43.2,28.17 42.44,28.17 42.06,28.23 IC19.2
  Bottom 0.254: JP19.7 43.71,26.33 43.71,27.47 41.4,29.78 IC20.7
N$119
  Top 0.305: JP19.6 43.46,29.44 42.44,29.44 42.06,29.5 IC19.3
  Bottom 0.254: IC20.6 40.37,30.39 42.19,30.39 42.26,30.29 44.95,27.6 JP19.6
N$120
  Top 0.305: JP19.5 44.73,30.71 42.44,30.71 42.06,30.77 IC19.4
  Bottom 0.254: JP19.5 44.03,31.09 40.34,31.09 IC20.5
N$121
  Top 0.305: JP19.4 44.73,32.11 42.44,32.11 42.06,32.05 IC19.5
  Bottom 0.254: JP19.4 44.03,31.73 40.34,31.73 IC20.4
N$122
  Top 0.305: JP19.3 43.46,33.38 42.12,33.38 42.06,33.31 IC19.6
  Bottom 0.254: IC20.3 40.37,32.43 42.19,32.43 42.26,32.53 44.95,35.22 JP19.3
N$123
  Top 0.305: JP19.2 43.58,37.76 43.58,35.03 43.2,34.65 42.44,34.65 42.06,34.59 IC19.7
  Bottom 0.254: JP19.2 43.71,36.49 43.71,35.35 41.4,33.04 IC20.2
N$124
  Top 0.305: JP19.1 42.06,40.3 42.06,35.85 IC19.8
  Bottom 0.254: JP19.1 40.34,35.66 40.34,33.7 IC20.1
N$125
  Top 0.305: JP20.1 32.66,22.52 32.66,26.96 IC19.16
  Bottom 0.254: JP20.1 34.38,27.16 34.38,29.12 IC20.9
N$126
  Top 0.305: JP20.2 31.14,25.06 31.14,27.79 31.52,28.17 32.28,28.17 32.66,28.23 IC19.15
  Bottom 0.254: JP20.2 31.01,26.33 31.01,27.47 33.32,29.78 IC20.10
N$127
  Top 0.305: JP20.3 30.95,29.44 32.28,29.44 32.66,29.5 IC19.14
  Bottom 0.254: IC20.11 34.35,30.39 32.53,30.39 32.46,30.29 29.77,27.6 JP20.3
N$128
  Top 0.305: JP20.4 29.99,30.71 32.28,30.71 32.66,30.77 IC19.13
  Bottom 0.254: JP20.4 30.69,31.09 34.38,31.09 IC20.12
N$129
  Top 0.305: JP20.5 29.99,32.11 32.28,32.11 32.66,32.05 IC19.12
  Bottom 0.254: JP20.5 30.69,31.73 34.38,31.73 IC20.13
N$130
  Top 0.305: JP20.6 30.95,33.38 32.28,33.38 32.66,33.31 IC19.11
  Bottom 0.254: IC20.14 34.35,32.43 32.53,32.43 32.46,32.53 29.77,35.22 JP20.6
N$131
  Top 0.305: JP20.7 31.14,37.76 31.14,35.03 31.52,34.65 32.28,34.65 32.66,34.59 IC19.10
  Bottom 0.254: JP20.7 31.01,36.49 31.01,35.35 33.32,33.04 IC20.15
N$132
  Top 0.305: JP20.8 32.66,40.3 32.66,35.85 IC19.9
  Bottom 0.254: JP20.8 34.38,35.66 34.38,33.7 IC20.16
N$133
  Bottom 0.203: R32.2 D13.A
N$134
  Bottom 0.203: R31.2 D14.A
N$135
  Top 0.203: R30.2 D15.A
N$136
  Top 0.203: R29.2 D16.A
NEG1  (via drill 0.8)  (1 unrouted)
  Top 0.203: R9.2 v40.53,3.42 40.63,3.42 D8.C | R10.2 v40.53,17.39 40.63,17.39 D7.C
  Bottom 0.203: R9.2 v40.53,3.42 40.63,3.42 D8.C | D5.C 40.31,17.39 v40.53,17.39 R10.2
NEG2  (via drill 0.8)  (1 unrouted)
  Top 0.203: R17.2 v22.54,24.43 22.63,24.43 D12.C | R18.2 v22.54,38.4 22.63,38.4 D11.C
  Bottom 0.203: R17.2 v22.54,24.43 22.63,24.43 D12.C | D9.C 22.32,38.4 v22.54,38.4 R18.2
NEG3  (via drill 0.8)  (1 unrouted)
  Top 0.203: R25.2 v40.53,24.43 40.63,24.43 D16.C | R26.2 v40.53,38.4 40.63,38.4 D15.C
  Bottom 0.203: R25.2 v40.53,24.43 40.63,24.43 D16.C | D13.C 40.31,38.4 v40.53,38.4 R26.2
NEG4  (via drill 0.8)  (1 unrouted)
  Top 0.203: R1.2 v22.54,3.42 22.63,3.42 D4.C | R2.2 v22.54,17.39 22.63,17.39 D3.C
  Bottom 0.203: R1.2 v22.54,3.42 22.63,3.42 D4.C | D1.C 22.32,17.39 v22.54,17.39 R2.2
POS1  (via drill 0.8)  (1 unrouted)
  Top 0.203: v34.19,17.39 R10.1 | R9.1 v34.19,3.42 v34.2,3.42 R13.1 R15.1 | v34.19,17.39 34.52,17.39 | R14.1 v34.2,17.39 v34.19,17.39
  Bottom 0.203: R9.1 v34.19,3.42 34.19,1.52 R15.1 | R16.1 R14.1 v34.2,17.39 v34.19,17.39 R10.1
POS2  (via drill 0.8)  (1 unrouted)
  Top 0.203: v16.18,38.4 R18.1 | R17.1 v16.18,24.43 16.2,24.43 R21.1 R23.1 | v16.18,38.4 16.52,38.4 | R22.1 16.2,38.4 v16.18,38.4
  Bottom 0.203: R17.1 v16.18,24.43 16.18,22.52 R23.1 | R24.1 R22.1 16.2,38.4 v16.18,38.4 R18.1
POS3  (via drill 0.8)  (1 unrouted)
  Top 0.203: v34.19,38.4 R26.1 | R25.1 v34.19,24.43 v34.2,24.43 R29.1 R31.1 | v34.19,38.4 34.52,38.4 | R30.1 v34.2,38.4 v34.19,38.4
  Bottom 0.203: R25.1 v34.19,24.43 34.19,22.52 R31.1 | R32.1 R30.1 v34.2,38.4 v34.19,38.4 R26.1
POS4  (via drill 0.8)  (1 unrouted)
  Top 0.203: v16.18,17.39 R2.1 | R1.1 v16.18,3.42 16.2,3.42 R5.1 R7.1 | v16.18,17.39 16.52,17.39 | R6.1 16.2,17.39 v16.18,17.39
  Bottom 0.203: R1.1 v16.18,3.42 16.18,1.52 R7.1 | R8.1 R6.1 16.2,17.39 v16.18,17.39 R2.1
(copper drawn outside any net)
  shapes: Top area x68

## Text on the board
tPlace: SRL | SRL | SRL | SRL | SRL | SRL | SmallRoom | Labs.com | SmallRoom | Labs.com | SRL | SRL | SmallRoom | Labs.com | SmallRoom | Labs.com
bPlace: SmallRoomLabs.com | SmallRoomLabs.com | SRL | SRL | SmallRoomLabs.com | SmallRoomLabs.com | SRL | SRL